# Altium PCB PCB Layout.PcbDoc
Units mil, origin at the board's own origin, x right, y up, seen from the top; angles counter-clockwise.
Board outline 8150 x 5500 mil, 2 copper layers (Top Layer, Bottom Layer); 110 components, 111 nets, 268 pads, 4 vias.
Unrouted connection lines stored in the file: 160.
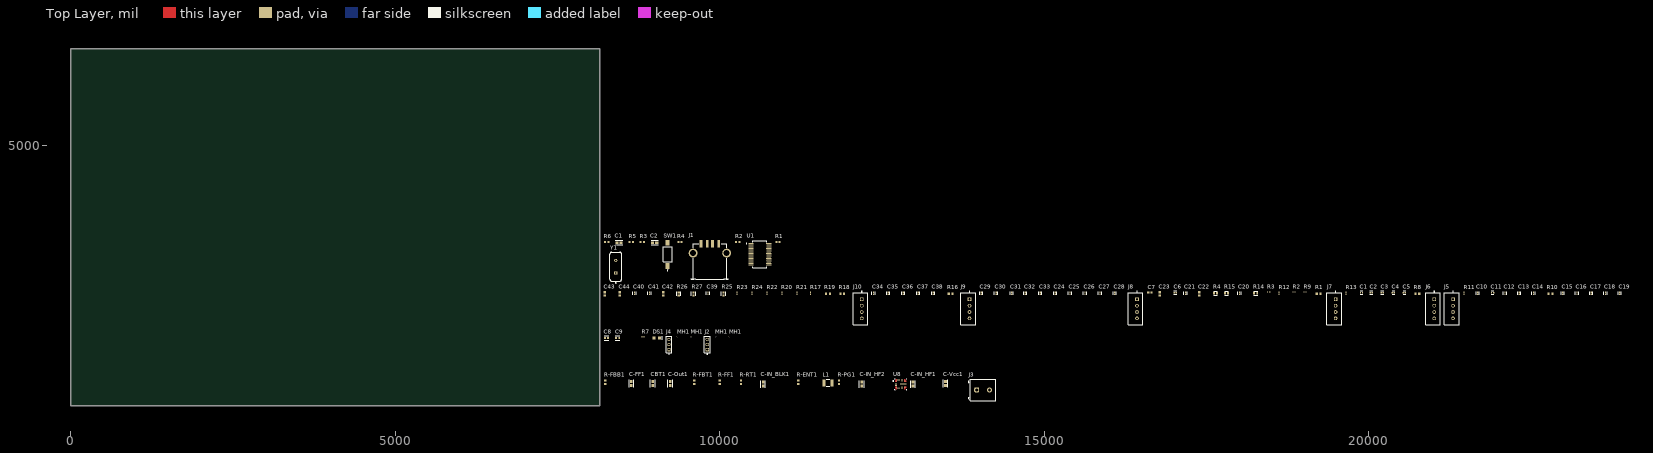
[diagram p0: Top Layer view]
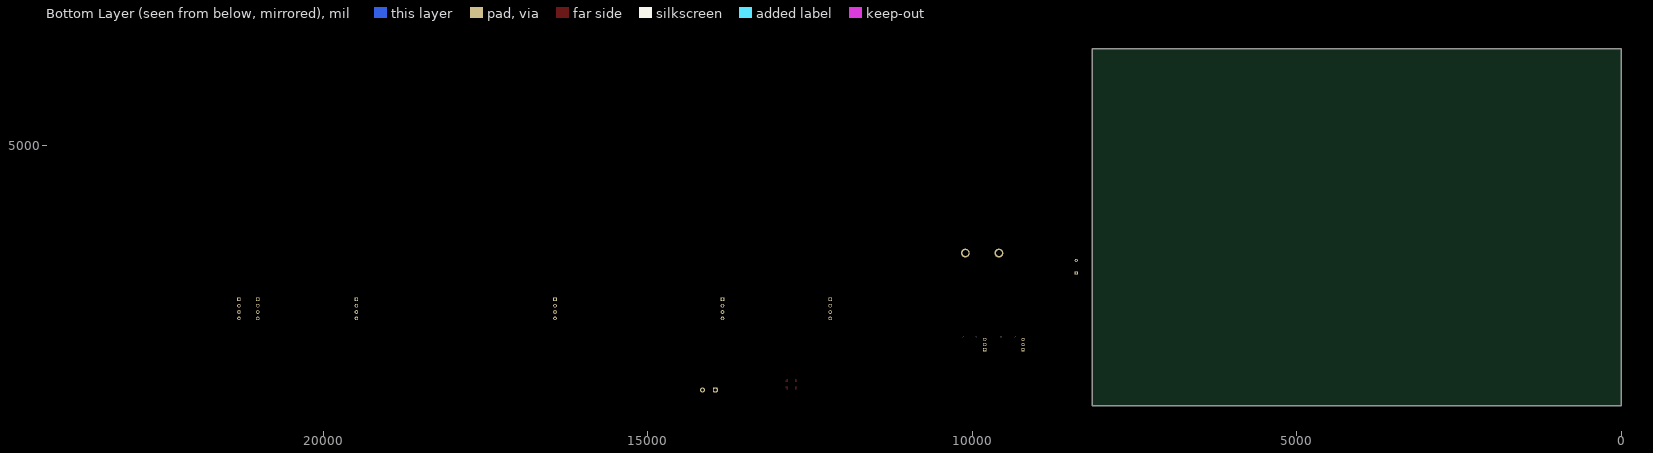
[diagram p1: Bottom Layer view, seen from below]

## Layer stack, top to bottom
Top Solder: solder mask 0.4, Solder Resist, Dk 3.5
Top Layer: signal copper 1.4
Dielectric 1: dielectric 12.6, FR-4, Dk 4.8
Bottom Layer: signal copper 1.4
Bottom Solder: solder mask 0.4, Solder Resist, Dk 3.5

## Board outline
0,1000 8150,1000 8150,6500 0,6500

## Design rules (kind name [scope] priority, off if disabled: settings)
Clearance [All] p1: gap=10 ignorepadtopadclearanceinfootprint=FALSE except(0: Arc-Hole Track-Hole SMDPad-Hole THPad-Hole Via-Hole Fill-Hole Poly-Hole Region-Hole Text-Hole)
PolygonConnect [All] p1: connectstyle=Relief reliefconductorwidth=10 reliefentries=4 polygonreliefangle="90 Angle" airgapwidth=10
RoutingVias [All] p1: holewidth=28 width=50 viastyle="Through Hole" minholewidth=28 minwidth=50 maxholewidth=28 maxwidth=50
SolderMaskExpansion [All] p1: expansion=4 istentingtop=FALSE
Width [All] p1: maxlimit=10 minlimit=10 preferedwidth=10
30 further rules are at their usual default settings.

## Classes and differential pairs
component class Drivers: C1 C2 C3 C4 C5 C6 C7 C10 C11 C12 C13 C14 C15 C16 C17 C18 C19 C20 C21 C22 C23 C24 C25 C26 C27 C28 C29 C30 C31 C32 C33 C34 C35 C36 C37 C38 C39 C40 C41 C42 C43 C44 J5 J6 J7 J8 J9 J10 R1 R2 R3 R4 R8 R9 R10 R11 R12 R13 R14 R15 R16 R17 R18 R19 R20 R21 R22 R23 R24 R25 R26 R27 U1 U?
component class FTDI: C1 C2 D1 D2 D3 J1 R1 R2 R3 R4 R5 R6 SW1 U1
component class Controller: C8 C9 DS1 J2 J4 MH1 R7 U1 Y1
component class Buck: C-FF1 C-IN_BLK1 C-IN_HF1 C-IN_HF2 C-Out1 C-Vcc1 CBT1 J3 L1 R-ENT1 R-FBB1 R-FBT1 R-FF1 R-PG1 R-RT1 U8

## Components (designator, comment, footprint, x,y, rotation, side; value= is the part's Value field where it differs from the comment)
C1 "C0402C104K8PACTU" FP-C0402-BB-MFG 19890,2740 r0 top value="0.10 μF"
C1 "GRM188R60J106ME47D" FP-GRM188-0_1-e0_2_0_55-IPC_A 8450,3510 r0 top
C2 "C0402C104K8PACTU" FP-C0402-BB-MFG 20040,2740 r0 top value="0.10 μF"
C2 "GRM188R60J106ME47D" FP-GRM188-0_1-e0_2_0_55-IPC_A 9000,3510 r0 top
C3 "C0402C104K8PACTU" FP-C0402-BB-MFG 20210,2740 r0 top value="0.10 μF"
C4 "C0402C104K8PACTU" FP-C0402-BB-MFG 20380,2740 r0 top value="0.10 μF"
C5 "C0402C104K8PACTU" FP-C0402-BB-MFG 20550,2740 r0 top value="0.10 μF"
C6 "C0402C104K8PACTU" FP-C0402-BB-MFG 17020,2740 r0 top value="0.10 μF"
C7 "06035C223KAZ2A" CAPC1608X90X35LL15T15 16630,2740 r0 top
C8 "C0603C220J1GACTU" FP-C0603C-CF-MFG 8260,2040 r0 top value="22 pF"
C9 "C0603C220J1GACTU" FP-C0603C-CF-MFG 8430,2040 r0 top value="22 pF"
C10 "C0402C104K8PACTU" FP-C0402-BB-MFG 21680,2730 r90 top value="0.10 μF"
C11 "C0402C104K8PACTU" FP-C0402-BB-MFG 21910,2740 r0 top value="0.10 μF"
C12 "C0402C104K8PACTU" FP-C0402-BB-MFG 22100,2730 r90 top value="0.10 μF"
C13 "C0402C104K8PACTU" FP-C0402-BB-MFG 22320,2730 r90 top value="0.10 μF"
C14 "C0402C104K8PACTU" FP-C0402-BB-MFG 22540,2730 r90 top value="0.10 μF"
C15 "C0402C104K8PACTU" FP-C0402-BB-MFG 22990,2730 r90 top value="0.10 μF"
C16 "C0402C104K8PACTU" FP-C0402-BB-MFG 23210,2730 r90 top value="0.10 μF"
C17 "C0402C104K8PACTU" FP-C0402-BB-MFG 23430,2730 r90 top value="0.10 μF"
C18 "C0402C104K8PACTU" FP-C0402-BB-MFG 23650,2730 r90 top value="0.10 μF"
C19 "C0402C104K8PACTU" FP-C0402-BB-MFG 23870,2730 r90 top value="0.10 μF"
C20 "C0402C104K8PACTU" FP-C0402-BB-MFG 18010,2730 r90 top value="0.10 μF"
C21 "C0402C104K8PACTU" FP-C0402-BB-MFG 17180,2730 r90 top value="0.10 μF"
C22 "06035C223KAZ2A" CAPC1608X90X35LL15T15 17390,2720 r90 top
C23 "06035C223KAZ2A" CAPC1608X90X35LL15T15 16780,2720 r90 top
C24 "C0402C104K8PACTU" FP-C0402-BB-MFG 15170,2730 r90 top value="0.10 μF"
C25 "C0402C104K8PACTU" FP-C0402-BB-MFG 15400,2730 r90 top value="0.10 μF"
C26 "C0402C104K8PACTU" FP-C0402-BB-MFG 15630,2730 r90 top value="0.10 μF"
C27 "C0402C104K8PACTU" FP-C0402-BB-MFG 15860,2730 r90 top value="0.10 μF"
C28 "C0402C104K8PACTU" FP-C0402-BB-MFG 16090,2730 r90 top value="0.10 μF"
C29 "C0402C104K8PACTU" FP-C0402-BB-MFG 14030,2730 r90 top value="0.10 μF"
C30 "C0402C104K8PACTU" FP-C0402-BB-MFG 14260,2730 r90 top value="0.10 μF"
C31 "C0402C104K8PACTU" FP-C0402-BB-MFG 14500,2730 r90 top value="0.10 μF"
C32 "C0402C104K8PACTU" FP-C0402-BB-MFG 14710,2730 r90 top value="0.10 μF"
C33 "C0402C104K8PACTU" FP-C0402-BB-MFG 14940,2730 r90 top value="0.10 μF"
C34 "C0402C104K8PACTU" FP-C0402-BB-MFG 12370,2730 r90 top value="0.10 μF"
C35 "C0402C104K8PACTU" FP-C0402-BB-MFG 12600,2730 r90 top value="0.10 μF"
C36 "C0402C104K8PACTU" FP-C0402-BB-MFG 12830,2730 r90 top value="0.10 μF"
C37 "C0402C104K8PACTU" FP-C0402-BB-MFG 13060,2730 r90 top value="0.10 μF"
C38 "C0402C104K8PACTU" FP-C0402-BB-MFG 13290,2730 r90 top value="0.10 μF"
C39 "C0402C104K8PACTU" FP-C0402-BB-MFG 9820,2730 r90 top value="0.10 μF"
C40 "C0402C104K8PACTU" FP-C0402-BB-MFG 8690,2730 r90 top value="0.10 μF"
C41 "C0402C104K8PACTU" FP-C0402-BB-MFG 8920,2730 r90 top value="0.10 μF"
C42 "06035C223KAZ2A" CAPC1608X90X35LL15T15 9130,2720 r90 top
C43 "06035C223KAZ2A" CAPC1608X90X35LL15T15 8230,2720 r90 top
C44 "06035C223KAZ2A" CAPC1608X90X35LL15T15 8460,2720 r90 top
C-FF1 "GRM188R60J106ME47D" FP-GRM188-0_1-e0_2_0_55-IPC_A 8640,1340 r90 top
C-IN_BLK1 "GRM188R60J106ME47D" FP-GRM188-0_1-e0_2_0_55-IPC_A 10670,1330 r90 top
C-IN_HF1 "GRM188R60J106ME47D" FP-GRM188-0_1-e0_2_0_55-IPC_A 12980,1330 r90 top
C-IN_HF2 "GRM188R60J106ME47D" FP-GRM188-0_1-e0_2_0_55-IPC_A 12190,1330 r90 top
C-Out1 "GRM188R60J106ME47D" FP-GRM188-0_1-e0_2_0_55-IPC_A 9240,1340 r90 top
C-Vcc1 "GRM188R60J106ME47D" FP-GRM188-0_1-e0_2_0_55-IPC_A 13480,1340 r90 top
CBT1 "GRM188R60J106ME47D" FP-GRM188-0_1-e0_2_0_55-IPC_A 8970,1340 r90 top
DS1 "HSMG-C170" AVAG-HSMX-C170_V 9030,2040 r0 top
J1 "62900416021" 62900416021 9850,3220 r0 top
J2 "NRPN031PAEN-RC" FP-NRPN031PAEN-RC-MFG 9810,1940 r90 top
J3 "691213710002" 691213710002 14060,1240 r0 top
J4 "NRPN031PAEN-RC" FP-NRPN031PAEN-RC-MFG 9220,1940 r90 top
J5 "B4B-XH-A(LF)(SN)" FP-B4B-XH-A_LF_SN-MFG 21280,2490 r90 top
J6 "B4B-XH-A(LF)(SN)" FP-B4B-XH-A_LF_SN-MFG 20990,2490 r90 top
J7 "B4B-XH-A(LF)(SN)" FP-B4B-XH-A_LF_SN-MFG 19470,2490 r90 top
J8 "B4B-XH-A(LF)(SN)" FP-B4B-XH-A_LF_SN-MFG 16410,2490 r90 top
J9 "B4B-XH-A(LF)(SN)" FP-B4B-XH-A_LF_SN-MFG 13830,2490 r90 top
J10 "B4B-XH-A(LF)(SN)" FP-B4B-XH-A_LF_SN-MFG 12170,2490 r90 top
L1 "" FP-B82422A-MFG 11670,1350 r0 top
MH1 "Mounting Hole_1" "Mounting Hole_1" 10150,2060 r90 top
MH1 "Mounting Hole_1" "Mounting Hole_1" 9560,2060 r90 top
MH1 "Mounting Hole_1" "Mounting Hole_1" 9350,2060 r90 top
MH1 "Mounting Hole_1" "Mounting Hole_1" 9940,2060 r90 top
R1 "RC0603JR-070RL" RESC1608X55X25ML10T15 19230,2720 r0 top
R1 "CRCW06030000Z0EA" RESC1609X50X30NL8T20 10900,3520 r0 top
R2 "CRCW0402220KFKED" RESC1005X40X25LL05T05 18850,2750 r0 top
R2 "CRCW06030000Z0EA" RESC1609X50X30NL8T20 10280,3520 r0 top
R3 "CRCW0402220KFKED" RESC1005X40X25LL05T05 18460,2750 r0 top
R3 "CRCW06030000Z0EA" RESC1609X50X30NL8T20 8810,3520 r0 top
R4 "CRCW0603100KJNEA" FP-CRCW0603-e3-IPC_C 17640,2730 r0 top
R4 "CRCW06030000Z0EA" RESC1609X50X30NL8T20 9390,3520 r0 top
R5 "CRCW06030000Z0EA" RESC1609X50X30NL8T20 8640,3520 r0 top
R6 "CRCW06030000Z0EA" RESC1609X50X30NL8T20 8260,3520 r0 top
R7 "CRCW0402220KFKED" RESC1005X40X25LL05T05 8820,2060 r0 top
R8 "RC0603JR-070RL" RESC1608X55X25ML10T15 20750,2720 r0 top
R9 "CRCW0402220KFKED" RESC1005X40X25LL05T05 19020,2750 r0 top
R10 "RC0603JR-070RL" RESC1608X55X25ML10T15 22800,2720 r0 top
R11 "CRCW0402220KFKED" RESC1005X40X25LL05T05 21470,2730 r90 top
R12 "CRCW0402220KFKED" RESC1005X40X25LL05T05 18620,2730 r90 top
R13 "CRCW0402220KFKED" RESC1005X40X25LL05T05 19650,2730 r90 top
R14 "CRCW0603100KJNEA" FP-CRCW0603-e3-IPC_C 18260,2730 r0 top
R15 "CRCW0603100KJNEA" FP-CRCW0603-e3-IPC_C 17810,2730 r0 top
R16 "RC0603JR-070RL" RESC1608X55X25ML10T15 13560,2720 r0 top
R17 "CRCW0402220KFKED" RESC1005X40X25LL05T05 11400,2730 r90 top
R18 "RC0603JR-070RL" RESC1608X55X25ML10T15 11890,2720 r0 top
R19 "RC0603JR-070RL" RESC1608X55X25ML10T15 11670,2720 r0 top
R20 "CRCW0402220KFKED" RESC1005X40X25LL05T05 10960,2730 r90 top
R21 "CRCW0402220KFKED" RESC1005X40X25LL05T05 11190,2730 r90 top
R22 "CRCW0402220KFKED" RESC1005X40X25LL05T05 10730,2730 r90 top
R23 "CRCW0402220KFKED" RESC1005X40X25LL05T05 10270,2730 r90 top
R24 "CRCW0402220KFKED" RESC1005X40X25LL05T05 10500,2730 r90 top
R25 "CRCW0603100KJNEA" FP-CRCW0603-e3-IPC_C 10060,2720 r90 top
R26 "CRCW0603100KJNEA" FP-CRCW0603-e3-IPC_C 9370,2720 r90 top
R27 "CRCW0603100KJNEA" FP-CRCW0603-e3-IPC_C 9600,2720 r90 top
R-ENT1 "" RESC1609X50X30NL8T20 11210,1360 r90 top
R-FBB1 "" RESC1609X50X30NL8T20 8240,1360 r90 top
R-FBT1 "" RESC1609X50X30NL8T20 9610,1360 r90 top
R-FF1 "" RESC1609X50X30NL8T20 10000,1360 r90 top
R-PG1 "" RESC1609X50X30NL8T20 11840,1360 r90 top
R-RT1 "" RESC1609X50X30NL8T20 10330,1360 r90 top
SW1 "FSMSMTR" TECO-FSMSMTR_V 9200,3330 r90 top
U1 "FT232RL-REEL" FP-SSOP-28-MFG 10620,3330 r0 top
U8 "LMQ61460AASQRJRRQ1" FP-RJR0014A-MFG 12790,1330 r0 top
Y1 "FOXSLF/160-20" FOX-FOXSLF160-20 8400,3140 r90 top

## Footprints (in the part's own frame and the unit in brackets; to place one, negate y for a bottom-side part, rotate by r counter-clockwise, add the part's x,y. Pads: shape width x height; smd on the part's side, far side on the other; paste and mask are expansions set on the pad)
62900416021 [mm] "USB 2.0 SMT Type A Horizontal"
  rect 1.12x2.88 smd: 1(-3.5,6.95) 2(-1,6.95) 3(1,6.95) 4(3.5,6.95)
  round 3.45 hole 2.3: Shell(-6.57,3.28) Shell(6.57,3.28)
  silkscreen extent -7.25,-7 7.29,7, body extent -7.81,-7 7.81,8.41, height 7.81
691213710002 [mm] "5,00mm - modular - green - Horizontal entry with rising cage clamp -  10,0mm height - 02p"
  rrect50% 1.95x1.95 hole 1.3: 1(-2.5,0)
  round 1.95 hole 1.3: 2(2.5,0)
  silkscreen extent -5.6,-4.15 5,4.15, body extent -5.6,-4.15 5,4.15, height 10.05
AVAG-HSMX-C170_V [mm] "SMD, 2-Leads, Body 2x1.25mm, Height 0.8mm"
  rect 1.2x1.2 smd: 1(-1.05,0) 2(1.05,0)
  silkscreen extent 2.15,-0.63 2.15,0.63, body extent -1,-0.63 1,0.63, height 0.8
CAPC1608X90X35LL15T15 [mm] "Chip Capacitor, 2-Leads, Body 1.60x0.81mm, IPC High Density"
  rect 0.85x0.9 smd: 1(-0.65,0) 2(0.65,0)
  body extent -0.88,-0.48 0.87,0.48, height 0.9
FOX-FOXSLF160-20 [mm] "THD, 2-Leads, Body 11.35x4.65mm"
  rect 1.2x1.2 hole 0.7: 1(-2.44,0)
  round 1.2 hole 0.7: 2(2.44,0)
  silkscreen extent -6.45,-2.32 5.68,2.32, body extent -5.67,-2.32 5.68,2.33, height 3.6
FP-B4B-XH-A_LF_SN-MFG [mm]
  rect 1.4x1.4 hole 0.9 paste-1000 mask+0: 1(3.75,-0.525)
  round 1.4 hole 0.9 paste-1000 mask+0: 2(1.25,-0.525) 3(-1.25,-0.525) 4(-3.75,-0.525)
  silkscreen extent -6.2,-2.88 6.87,2.88, body extent -6.3,-2.98 6.3,2.98, height 0.25
FP-B82422A-MFG [mm]
  rect 1.15x2.7 smd paste+0 mask+0: 1(-1.625,0) 2(1.625,0)
  silkscreen extent -0.67,-1.4 0.67,1.4, body extent -2.3,-1.5 2.3,1.5, height 0.25
FP-C0402-BB-MFG [mm]
  rect 0.52x0.52 smd paste+0 mask+0: 1(-0.4,0) 2(0.4,0)
  silkscreen extent -0.5,-0.64 0.5,0.64, body extent -0.8,-0.4 0.8,0.4, height 0.25
FP-C0603C-CF-MFG [mm]
  rect 0.75x0.9 smd paste+0 mask+0: 1(-0.6,0) 2(0.6,0)
  silkscreen extent -0.87,-0.85 0.88,0.85, body extent -1.2,-0.6 1.2,0.6, height 0.25
FP-CRCW0603-e3-IPC_C [mil]
  rect 28.94x33.94 smd paste+0 mask+0: 1(-24.23,0) 2(24.23,0)
  silkscreen extent -30,-33 30,33, body extent -43,-23 43,23, height 10
FP-GRM188-0_1-e0_2_0_55-IPC_A [mil]
  rect 47.57x39.85 smd paste+0 mask+0: 1(-31.57,0) 2(31.57,0)
  silkscreen extent -55,-36 55,36, body extent -75,-40 75,40, height 10
FP-NRPN031PAEN-RC-MFG [mm]
  rect 1.3x1.3 hole 0.8 paste-1000 mask+0: 1(-2,0)
  round 1.3 hole 0.8 paste-1000 mask+0: 2(0,0) 3(2,0)
  silkscreen extent -3.8,-1.1 3.25,1.1, body extent -3.35,-1.2 3.35,1.2, height 0.25
FP-RJR0014A-MFG [mm]
  round 0.394 smd paste-1000 mask+0: 1(-1.719,1.169) 5(-1.719,-1.206)
  rrect40% 0.7x0.25 smd paste+0 mask+0: 2(-1.85,0.525) 4(-1.85,-0.525)
  rrect33% 0.7x0.3 smd paste+0 mask+0: 3(-1.85,0)
  rrect40% 0.25x0.7 smd paste+0 mask+0: 6(-1.125,-1.6) 7(-0.625,-1.6) 13(-0.625,1.6) 14(-1.125,1.6)
  rrect25% 0.4x1 smd paste+0 mask+0: 8(0.45,-1.45) 12(0.45,1.45)
  round 0.45 smd paste-1000 mask+0: 9(1.65,-1.2) 11(1.65,1.2)
  rrect25% 2.4x0.4 smd paste-1000 mask+0: 10(1,0)
  Top Layer region: 1.45,-1.95 1.75,-1.95 1.769,-1.946 1.785,-1.935 1.796,-1.919 1.8,-1.9 1.8,-1.9 1.8,-1.47 1.816,-1.41 1.86,-1.366 1.92,-1.35 1.92,-1.35 2.15,-1.35 2.169,-1.346 2.185,-1.335 2.196,-1.319 2.2,-1.3 2.2,-1.3 2.2,-1 2.193,-0.975 2.175,-0.957 2.15,-0.95 2.15,-0.95 1.45,-0.95 1.431,-0.954 1.415,-0.965 1.404,-0.981 1.4,-1 1.4,-1 1.4,-1.9 1.404,-1.919 1.415,-1.935 1.431,-1.946 1.45,-1.95 1.45,-1.95
  Top Layer region: 1.45,1.95 1.75,1.95 1.769,1.946 1.785,1.935 1.796,1.919 1.8,1.9 1.8,1.9 1.8,1.47 1.816,1.41 1.86,1.366 1.92,1.35 1.92,1.35 2.15,1.35 2.169,1.346 2.185,1.335 2.196,1.319 2.2,1.3 2.2,1.3 2.2,1 2.193,0.975 2.175,0.957 2.15,0.95 2.15,0.95 1.45,0.95 1.431,0.954 1.415,0.965 1.404,0.981 1.4,1 1.4,1 1.4,1.9 1.404,1.919 1.415,1.935 1.431,1.946 1.45,1.95 1.45,1.95
  Top Layer region: -1.55,-1.95 -1.531,-1.946 -1.515,-1.935 -1.504,-1.919 -1.5,-1.9 -1.5,-1.9 -1.5,-1 -1.507,-0.975 -1.525,-0.957 -1.55,-0.95 -1.55,-0.95 -2.15,-0.95 -2.175,-0.957 -2.193,-0.975 -2.2,-1 -2.2,-1 -2.2,-1.3 -2.196,-1.319 -2.185,-1.335 -2.169,-1.346 -2.15,-1.35 -2.15,-1.35 -1.97,-1.35 -1.924,-1.359 -1.885,-1.385 -1.859,-1.424 -1.85,-1.47 -1.85,-1.47 -1.85,-1.9 -1.846,-1.919 -1.835,-1.935 -1.819,-1.946 -1.8,-1.95 -1.8,-1.95 -1.8,-1.95
  Top Layer region: -1.8,1.95 -1.55,1.95 -1.531,1.946 -1.515,1.935 -1.504,1.919 -1.5,1.9 -1.5,1.9 -1.5,1 -1.507,0.975 -1.525,0.957 -1.55,0.95 -1.55,0.95 -2.15,0.95 -2.175,0.957 -2.193,0.975 -2.2,1 -2.2,1 -2.2,1.3 -2.196,1.319 -2.185,1.335 -2.169,1.346 -2.15,1.35 -2.15,1.35 -1.97,1.35 -1.924,1.359 -1.885,1.385 -1.859,1.424 -1.85,1.47 -1.85,1.47 -1.85,1.9 -1.846,1.919 -1.835,1.935 -1.819,1.946 -1.8,1.95 -1.8,1.95
  silkscreen extent -3.02,-2.15 2.4,2.15, body extent -2.3,-2.05 2.3,2.05, height 0.25
FP-SSOP-28-MFG [mm]
  rect 2x0.4 smd paste+0 mask+0: 1(-3.5,4.225)
  rrect100% 2x0.4 smd paste+0 mask+0: 2(-3.5,3.575) 3(-3.5,2.925) 4(-3.5,2.275) 5(-3.5,1.625) 6(-3.5,0.975) 7(-3.5,0.325) 8(-3.5,-0.325) 9(-3.5,-0.975) 10(-3.5,-1.625) 11(-3.5,-2.275) 12(-3.5,-2.925) 13(-3.5,-3.575) 14(-3.5,-4.225) 15(3.5,-4.225) 16(3.5,-3.575) 17(3.5,-2.925) 18(3.5,-2.275) 19(3.5,-1.625) 20(3.5,-0.975) 21(3.5,-0.325) 22(3.5,0.325) 23(3.5,0.975) 24(3.5,1.625) 25(3.5,2.275) 26(3.5,2.925) 27(3.5,3.575) 28(3.5,4.225)
  silkscreen extent -5.3,-5.25 2.8,5.25, body extent -4.6,-5.55 4.6,5.55, height 0.25
"Mounting Hole_1" [mil]
RESC1005X40X25LL05T05 [mm] "Chip Resistor, 2-Leads, Body 1.00x0.50mm, IPC High Density"
  rect 0.45x0.45 smd: 1(-0.4,0) 2(0.4,0)
  body extent -0.53,-0.27 0.53,0.28, height 0.4
RESC1608X55X25ML10T15 [mm] "Chip Resistor, 2-Leads, Body 1.60x0.80mm, IPC Low Density"
  rect 0.8x1 smd: 1(-0.75,0) 2(0.75,0)
  body extent -0.85,-0.45 0.85,0.45, height 0.55
RESC1609X50X30NL8T20 [mm] "Chip Resistor, 2-Leads, Body 1.65x0.95mm, IPC Medium Density"
  rect 0.8x0.95 smd: 1(-0.65,0) 2(0.65,0)
  body extent -0.82,-0.48 0.82,0.48, height 0.5
TECO-FSMSMTR_V [mm] "SMD, 2-Leads, Body 6x3.5mm, Pitch 9.19mm"
  rect 2.2x1.6 smd: 1(-4.595,0)
  rect 2.18x1.6 smd: 2(4.595,0)
  silkscreen extent -6.37,-1.75 3,1.75, body extent -4.98,-1.75 4.98,1.75, height 4.4

## Part data
C1 C2 C3 C4 C5 C6 C10 C11 C12 C13 C14 C15 C16 C17 C18 C19 C20 C21 C24 C25 C26 C27 C28 C29 C30 C31 C32 C33 C34 C35 C36 C37 C38 C39 C40 C41: library part CMP-2008-02046-2, "CAP CER 0.1UF 10V X5R 0402", Capacitance="0.10 μF", Manufacturer=Kemet, Package=C0402-BB, Temperature="-55°C to +125°C", Temperature Characteristic=X5R, Temperature Coefficient=15%, Temperature Range High=+125°C, Temperature Range Low=-55°C, Tolerance=0.1, Voltage Rating="10 V", Automotive=No, Category=Cap, ComponentLink2Description=Datasheet, ComponentLink2URL=https://content.kemet.com/datasheets/KEM_C1002_X7R_SMD.pdf, Device Class L1="Passive Components", Device Class L2=Capacitors, Device Class L3="Ceramic Capacitors", Digikey Description="CAP CER 0.1UF 10V X5R 0402", Height=0.55mm, Ipc Land Pattern Name=CAPC10050X50, Lead Free=Yes, Manufacturer Part Number=C0402C104K8PACTU, Material=Ceramic, Mouser Description="Capacitor 100 nF 10 VDC 0402", Octopart=https://octopart.com/c0402c104k8pactu-kemet-140039, RoHS=TRUE
C1 C2 C-FF1 C-IN_BLK1 C-IN_HF1 C-IN_HF2 C-Out1 C-Vcc1 CBT1: library part CMP-2006-02792-2, "Chip Multilayer Ceramic Capacitors for General Purpose, 0603, 10uF, X5R, 15%, 20%, 6.3V", Capacitance=10uF, Case Code (Imperial)=0603, Case Code (Metric)=1608, Dielectric=X5R, Max Operating Temperature=85°C, Min Operating Temperature=-55°C, Package Quantity=4000, Tolerance=20%, Voltage=6.3V, Case/Package=0603, Depth=0.8mm, Height=0.8mm, Lead Free="Lead Free", Length=1.6mm, Material=Ceramic, Mount="Surface Mount", Packaging="Tape and Reel", Radiation Hardening=No, REACH SVHC="No SVHC", Termination=SMD/SMT, Thickness=0.035inch, Voltage Rating=6.3V, Voltage Rating (DC)=6.3V, Width=0.031inch
C7 C22 C23 C42 C43 C44: library part CMP-2006-02066-1, Manufacturer="AVX Interconnect / Elco", Part Number=06035C223KAZ2A
C8 C9: library part CMP-2006-03322-2, "CAP CER 22PF 100V 5% NP0 0603", Capacitance="22 pF", Manufacturer=KEMET, Package=C0603C-CF, Temperature="-55°C to +125°C", Temperature Characteristic=C0G, Temperature Coefficient=30ppm/°C, Temperature Range High=+125°C, Temperature Range Low=-55°C, Tolerance=0.05, Voltage Rating="100 V", Automotive=Yes, Automotive Grade="Grade 1", Category=Cap, ComponentLink2Description=Datasheet, ComponentLink2URL=https://api.kemet.com/component-edge/download/datasheet/C0603C100J5GACAUTO.pdf, Device Class L1="Passive Components", Device Class L2=Capacitors, Device Class L3="Ceramic Capacitors", Digikey Description="CAP CER 22PF 100V 5% NP0 0603", Height=0.87mm, Lead Free=Yes, Manufacturer Part Number=C0603C220J1GACTU, Material=Ceramic, Mouser Description="Multilayer Ceramic Capacitors MLCC - SMD/SMT 100volts 22pF C0G 5%", Octopart=https://octopart.com/c0603c220j1gactu-kemet-9142653, RoHS=TRUE
DS1: library part CMP-2000-05062-1, "Chip LED, Green, 2.2 V, -40 to 85 degC, 2-Pin SMD, Pb-Free, Tape and Reel", Forward Current If=20mA, Forward Voltage=2.2V, Forward Voltage VF Max=2.6V, LED Colour=Green, Manufacturer=Avago, Operating Temperature Max=85degC, Operating Temperature Min=-30degC, Operating Temperature Range=-30degCto+85degC, Opto Case Style=SMD, Package Description="2-Pin Surface Mount Device, Body 2 x 1.25 mm, Height 0.8 mm", Package Reference=HSMX-C170, Storage Temperature Min=-40degC, Bulb Size=1.25mmx1.4mm, Datasheet URL=https://datasheet.ciiva.com/29280/180495-da-01-en-chip-led-hsmg-c170-gelb-gruen-29280971.pdf, Datasheet Version=Oct-08, Dominant Wavelength=572nm, Dominant Wavelength Typ=572nm, External Depth=0.8mm, External Length / Height=2mm, External Width=1.25mm, Forward Current If Max=20mA, LED Mounting=SMD, LED Type=Standard, Lens Shape=Rectangular, Light Area Height=1mm, Luminous Intensity=15mcd, Luminous Intensity Min=4mcd, Luminous Intensity Typ=15mcd, Manufacturer URL=http://www.avagotech.com/, Mounting Type=SMD, MSL=MSL2A-4weeks, No. of Pins=2, Opto Mounting Orientation=Top, Packaging=CutTape, Peak Forward Current=20mA, Peak Wavelength=570nm, PIV Max=5V, Storage Temperature Max=85degC, SVHC=NoSVHC(16-Jun-2014), Viewing Angle=170deg, Voltage Vf Typ=2.2V, Wavelength Typ=570nm
J1: library part CMP-1502-03240-2, Contact Resistance=20mΩ, Current Rating=1.5A, Insulation Resistance=1GΩ, Max Operating Temperature=105°C, Min Operating Temperature=-40°C, Operating Supply Voltage=30V, Connector Type=USB, Contact Plating=Gold, Features=Shielded, Gender=Receptacle, Lead Free="Lead Free", Length=14.4mm, Mount="Horizontal, Surface Mount", NexarPartId=19991170, Number of Contacts=4, Number of Pins=4, Orientation=Horizontal, Packaging="Cut Tape", REACH SVHC=Unknown, RoHS=Compliant, Termination=SMD/SMT, USB Standard="USB 2.0"
J2 J4: library part CMP-25680-000021-1, "CONN HEADER VERT 3POS 2MM", Current Rating=2A, Manufacturer=Sullins, Package=0, Temperature="-40°C to +105°C", Temperature Range High=+105°C, Temperature Range Low=-40°C, Voltage Rating=150V, Automotive=No, Category=Conn, ComponentLink2Description=Datasheet, ComponentLink2URL=https://drawings-pdf.s3.amazonaws.com/10531.pdf, Conn Gender=Male, Conn Orientation=Straight, Contact Material=Gold,Nickel, Device Class L1=Connectors, Device Class L2="Headers and Wire Housings", Device Class L3=unset, Digikey Description="CONN HEADER VERT 3POS 2MM", Height=6mm, Lead Free=Yes, Manufacturer Part Number=NRPN031PAEN-RC, Number of Contacts=3, Number Of Rows=1, Octopart=https://octopart.com/nrpn031paen-rc-sullins-12817732, Pitch=2mm, RoHS=TRUE
J3: library part CMP-1502-02526-2, Color=Green, Current=10A, Max Operating Temperature=105°C, Min Operating Temperature=-40°C, Voltage=300V, Contact Material=Brass, Contact Plating=Tin, Current Rating=10A, Height=10mm, Housing Material=Nylon, Lead Pitch=5mm, Length=8.3mm, Mount="Through Hole", NexarPartId=8917718, Number of Contacts=2, Number of Levels=1, Number of Pins=2, Number of Positions Per Level=2, Packaging=Box, Pitch=5.0038mm, Plating="Brass, Steel", REACH SVHC=Unknown, RoHS=Compliant, Stripping Length=-7mm, Termination=Screw, Voltage Rating=300V, Width=10.6mm, Wire Gauge (Max)=26AWG, Wire Gauge (Min)=16AWG, Wire/Cable Gauge=26AWG
J5 J6 J7 J8 J9 J10: library part CMP-17439-000250-1, "CONN HEADER VERT 4POS 2.5MM", Color=Natural, Contact Resistance=20mR, Current Rating=3A, Flammability Rating="UL94 V-0", Housing Color=White, Insulation Resistance=1GR, Max Operating Temperature=85°C, Max Voltage Rating (AC)=250V, Min Operating Temperature=-25°C, Package Quantity=500, Connector Type=Header, Contact Finish - Mating=TIN, Contact Material=Brass, Contact Plating=Tin, Contact Shape=Square, Contact Type="Male Pin", Depth=5.75mm, Fastening Type=Detent, Gender=Male, Housing Material=Polyamide, Insulation Color=Natural, Insulation Material=Nylon, Lead Free="Lead Free", Lead Pitch=2.5mm, Length=12.4mm, Mated Stacking Heights=9.8mm, Material=Polyamide, Max Current Rating=3A, Max Voltage Rating (DC)=250V, Mount="Through Hole", Number of Contacts=4, Number of Positions=4, Number Of Rows=1, Orientation=Straight, Packaging=Bulk, Pitch=2.5mm, REACH SVHC="No SVHC", Series=XH, Termination=Solder, Voltage Rating=250V, Voltage Rating (AC)=250V, Wire/Cable Gauge=22AWG
L1: library part CMP-2000-05912-2, "FIXED IND 10UH 180MA 1.6 OHM SMD", Case Code (Imperial)=1210, Case Code (Metric)=3225, Current Rating=180mA, DC Resistance (DCR)=1.6R, Inductance=10uH, Inductance Tolerance=10%, Max Operating Temperature=125°C, Package Quantity=2000, Ratings=AEC-Q200, Resistor Type=Wirewound, Self Resonant Frequency=25MHz, Test Frequency=1MHz, Case/Package=1210, Contact Plating=Tin, Core Material=Ferrite, DC Current=180mA, Depth=2.8mm, Height=2.1mm, Height - Seated (Max)=0.083inch, Lead Free="Lead Free", Length=3.5mm, Max DC Current=180mA, Military Standard=Not, Mount="Surface Mount", Number of Pins=2, Packaging="Tape and Reel", Q Factor=27, Radiation Hardening=No, Rated Current-Max=180mA, REACH SVHC="No SVHC", RoHS Compliant=Yes, Series=SIMID, Series Resistance=1.6R, Shielding=Unshielded, Termination=SMD/SMT, Tolerance=10%, Weight=0.001764oz, Width=0.098inch
R1 R8 R10 R16 R18 R19: library part CMP-2100-03667-1, "Chip Resistor, 0 Ohm, +/- 5%, 0.1 W, -55 to 155 degC, 0603 (1608 Metric), RoHS, Tape and Reel", Case Code (Imperial)=0603, Case Code (Metric)=1608, Manufacturer=Yageo, Max Operating Temperature=155degC, Min Operating Temperature=-55degC, Package Description="2-Pin Surface Mount Device, Body 1.6 x 0.8 mm", Package Quantity=5000, Power Rating=100mW, Resistance=0mOhm, Temperature Coefficient=200ppm/degreesC, Tolerance=5%, Voltage Rating=50V, Case/Package=0603, Composition=ThickFilm, Contact Plating=Tin, Datasheet URL=http://www.yageo.com/NewPortal/yageodocoutput?fileName=/pdf/R-Chip/PYu-RC_Group_51_RoHS_L_5.pdf, Datasheet Version="Rev. 5, 10/2016", Depth=0.8mm, Height=0.45mm, Lead Free=LeadFree, Length=1.6mm, Manufacturer URL=http://www.yageo.com/, Military Standard=Not, Number of Pins=2, Package Reference=0603, Packaging=TapeandReel, Radiation Hardening=No, REACH SVHC=NoSVHC, RoHSCompliant=true, Termination=SMD/SMT, Voltage Rating (DC)=50V, Width=0.8mm
R1 R2 R3 R4 R5 R6 R-ENT1 R-FBB1 R-FBT1 R-FF1 R-PG1 R-RT1: library part CMP-2000-03816-5, "Chip Resistor, 0 Ohm, Jumper, 100 mW, -55 to 155 degC, 0603 (1608 Metric), RoHS, Tape and Reel", Manufacturer="Vishay Semiconductor", Max Operating Temperature="155 degC", Min Operating Temperature="-55 degC", Package Quantity=5000, Voltage Rating="75 V", ComponentLink1Description="Manufacturer URL", ComponentLink1URL=http://www.vishay.com/, ComponentLink2Description=Datasheet, ComponentLink2URL=http://www.vishay.com/docs/20035/dcrcwe3.pdf, DatasheetVersion=06/2012, Height="0.45 mm", Length="1.55 mm", Mount="Surface Mount", Mounting Technology="Surface Mount", PackageDescription="2-Pin Surface Mount Device, Body 1.575 x 0.85 mm", PackageReference=0603, Packaging="Tape and Reel", Pins=2, REACH SVHC=Unknown, RoHSCompliant=true
R2 R3 R7 R9 R11 R12 R13 R17 R20 R21 R22 R23 R24: library part CMP-2002-08370-1, Manufacturer="Vishay Dale", Part Number=CRCW0402220KFKED
R4 R14 R15 R25 R26 R27: library part CMP-2000-03823-2, "RES Thick Film, 100kΩ, 5%, 0.1W, 200ppm/°C, 0603", Case Code (Imperial)=0603, Case Code (Metric)=1608, Max Operating Temperature=155°C, Max Power Dissipation=100mW, Min Operating Temperature=-55°C, Package Quantity=1, Resistance=100kR, Temperature Coefficient=200ppm/°C, Tolerance=5%, Voltage Rating=75V, Case/Package=0603, Composition="Thick Film", Contact Plating=Tin, Depth=0.85mm, Features="Automotive AEC-Q200", Height=0.02inch, Length=1.55mm, Military Standard=Not, Mount="Surface Mount", Number of Pins=2, Number of Terminations=2, Packaging="Tape and Reel", Power Rating=100mW, Radiation Hardening=No, Termination=SMD/SMT, Weight=7.1E-05oz, Width=0.85mm, Working Voltage=75V
SW1: library part CMP-2000-07501-1, "FSMSM Push Button Switch, 50 mA, -35 to 85 degC, 2-Pin SMD, RoHS, Tape and Reel", Case\/Package=SMD/SMT, Contact Current Rating=50mA, Contact Resistance=100mOhm, Manufacturer="TE Connectivity", Max Operating Temperature=85degC, Max Voltage Rating (DC)=12V, Min Operating Temperature=-35degC, Operating Force=180gf, Package Description="2-Pin Surface Mount Device, Body 6 x 3.5 mm, Pitch 9.19 mm", Package Quantity=1800, Voltage Rating (DC)=24V, Actuator Length=1.07mm, Actuator Material=Polyamide, Contact Material=Brass, Contact Plating=Silver, Current Rating=50mA, Datasheet URL=http://www.te.com/commerce/DocumentDelivery/DDEController?Action=showdoc&DocId=Customer+Drawing%7F1437566-3%7FC2%7Fpdf%7FEnglish%7FENG_CD_1437566-3_C2_1437566_3_1_c.dwg.pdf%7F1437566-4, Datasheet Version="Rev. C2, 08/2014", Electrical Life=20000Cycles, ELV=Compliant, Illumination Type=Illuminated, Lead Free=LeadFree, Manufacturer URL=http://www.te.com/, Mechanical Life=20000Cycles, Mount=SurfaceMount, Mounting Technology=SurfaceMount, Orientation=Straight, Package Reference=FSMSMTR, Packaging=TapeandReel, REACH SVHC=Unknown, RoHSCompliant=true, Switch Travel=0.25mm, Termination=GullWing, Throw Configuration=SPST
U1: library part CMP-0078-00029-4, "IC USB FS SERIAL UART 28-SSOP", Case/Package=SSOP, Max Operating Temperature=85°C, Max Supply Voltage=5.25V, Min Operating Temperature=-40°C, Min Supply Voltage=3.3V, Operating Supply Current=15mA, Package Quantity=2000, Voltage=5V, Data Rate=12Mbps, Height=1.75mm, Interface=UART, Lead Free="Lead Free", Length=10.2mm, Mount="Surface Mount", Number of Channels=1, Number of Pins=28, Number of Transceivers=1, Packaging="Tape and Reel", Radiation Hardening=No, REACH SVHC="No SVHC", Weight=0.080001oz, Width=5.3mm
U8: library part CMP-04918-000596-1, "AUTOMOTIVE 3-V TO 36-V, 6-A LOW"
Y1: library part CMP-1749-00003-1, "Resistance Weld Thru-Hole Crystal, 16 MHz, -20 to 70 degC, 2-Pin THD, RoHS, Bulk", Case\Package=Axial, Max Operating Temperature="155 degC", Min Operating Temperature="-55 degC", Package Quantity=200, Power Rating="250 mW", Resistance="221 kohm", Tolerance=1%, Voltage Rating="250 V", ComponentLink1Description="Manufacturer URL", ComponentLink1URL=http://www.foxonline.com/, ComponentLink2Description=Datasheet, ComponentLink2URL=http://www.foxonline.com/pdfs/hc49slf.pdf, DatasheetVersion=Mar-15, Length="0.248 inch", Mount="Through Hole", PackageDescription="2-Pin Through Hole Device, Body 11.35 x 4.65 mm", PackageReference=FOXSLF160-20, Packaging=Bulk, RoHSCompliant=true

## Via types
v1: diameter 20.87, hole 18, Top Layer to Bottom Layer, 4 vias

## Nets (pads, with @x,y where several pads share a name; then routed paths per layer and width w, separated by ;. In a path a pad name is that pad's centre, name@x,y a point inside that pad or via, vN(x,y) a via of type N, cw(c..) or ccw(c..) an arc to the next point about the centre after c; other vN are vias at no path point)
"24 V": C1.1@19874.25,2740 C2.1@20024.25,2740 C3.1 C4.1 C5.1 C6.1 C10.1 C11.1 C12.1 C13.1 C14.1 C15.1 C16.1 C17.1 C18.1 C19.1 C20.1 C21.1 C24.1 C25.1 C26.1 C27.1 C28.1 C29.1 C30.1 C31.1 C32.1 C33.1 C34.1 C35.1 C36.1 C37.1 C38.1 C39.1 C40.1 C41.1 C-IN_BLK1.2 C-IN_HF1.2 C-IN_HF2.2 J3.2 R-ENT1.1 U1.28 U8.8 U8.12
+5: C1.1@8418.43,3510 C-Out1.1 J1.1 L1.2 R3.2@8835.59,3520 R4.2@9415.59,3520 R5.2 R6.2 R7.1 R-FBT1.2 R-FF1.2 R-PG1.1 U8.1
GND: C1.2 C2.2@20055.75,2740 C3.2 C4.2 C8.2 C9.2 C10.2 C11.2 C12.2 C13.2 C15.2 C16.2 C17.2 C18.2 C24.2 C25.2 C26.2 C27.2 C29.2 C30.2 C31.2 C32.2 C34.2 C35.2 C36.2 C37.2 C-IN_BLK1.1 C-IN_HF1.1 C-IN_HF2.1 C-Out1.2 C-Vcc1.2 J1.4 J1.Shell J3.1 R1.1@19200.47,2720 R2.2@18865.75,2750 R3.2@18475.75,2750 R4.2@17664.23,2730 R8.1 R9.2 R10.1 R11.2 R12.2 R13.2 R14.2 R15.2 R16.1 R17.2 R18.1 R19.1 R20.2 R21.2 R22.2 R23.2 R24.2 R25.2 R26.2 R27.2 R-FBB1.1 R-PG1.2 R-RT1.1 SW1.2 U1.3 U1.18 U8.3 U8.5 U8.9 U8.11
NetC2_1: C2.1@8968.43,3510
NetC2_2: C2.2@9031.57,3510 R4.1@9364.41,3520 SW1.1
NetC5_2: C5.2 R1.2@19259.53,2720
NetC6_2: C6.2
NetC7_1: C7.1 U1.5
NetC7_2: C7.2
NetC8_1: C8.1 U1.7 Y1.2
NetC9_1: C9.1 U1.8 Y1.1
NetC14_2: C14.2 R8.2
NetC19_2: C19.2 R10.2
NetC20_2: C20.2
NetC21_2: C21.2
NetC22_1: C22.1
NetC22_2: C22.2
NetC23_1: C23.1
NetC23_2: C23.2
NetC28_2: C28.2 R16.2
NetC33_2: C33.2 R18.2
NetC38_2: C38.2 R19.2
NetC39_2: C39.2
NetC40_2: C40.2
NetC41_2: C41.2
NetC42_1: C42.1
NetC42_2: C42.2
NetC43_1: C43.1
NetC43_2: C43.2
NetC44_1: C44.1
NetC44_2: C44.2
NetC-FF1_1: C-FF1.1 R-FF1.1
NetC-FF1_2: C-FF1.2 R-FBB1.2 R-FBT1.1 U8.4
NetC-Vcc1_1: C-Vcc1.1 U8.2
NetCBT1_1: CBT1.1 L1.1 U8.10
NetCBT1_2: CBT1.2 U8.13 U8.14
NetD1_1: R6.1
NetD2_1: R5.1
NetD2_2: 
NetD3_1: R3.1@8784.41,3520
NetD3_2: 
NetDS1_1: DS1.1 R7.2
NetDS1_2: DS1.2 U1.4
NetJ1_2: J1.2
NetJ1_3: J1.3
NetJ2_1: J2.1
NetJ2_2: J2.2 U1.25
NetJ2_3: J2.3
NetJ4_1: J4.1 U1.19
NetJ4_2: J4.2 U1.22
NetJ4_3: J4.3 U1.23
NetJ5_1: J5.1
NetJ5_2: J5.2
NetJ5_3: J5.3
NetJ5_4: J5.4
NetJ6_1: J6.1 U1.24
NetJ6_2: J6.2 U1.21
NetJ6_3: J6.3 U1.26
NetJ6_4: J6.4 U1.1
NetJ7_1: J7.1
NetJ7_2: J7.2
NetJ7_3: J7.3
NetJ7_4: J7.4
NetJ8_1: J8.1
NetJ8_2: J8.2
NetJ8_3: J8.3
NetJ8_4: J8.4
NetJ9_1: J9.1
NetJ9_2: J9.2
NetJ9_3: J9.3
NetJ9_4: J9.4
NetJ10_1: J10.1
NetJ10_2: J10.2
NetJ10_3: J10.3
NetJ10_4: J10.4
NetR1_1: R1.1@10874.41,3520
NetR1_2: R1.2@10925.59,3520
NetR2_1: R2.1@18834.25,2750
NetR2_2: R2.2@10305.59,3520
NetR3_1: R3.1@18444.25,2750 U1.27
NetR4_1: R4.1@17615.77,2730 U1.20
NetR9_1: R9.1
NetR11_1: R11.1
NetR12_1: R12.1
NetR13_1: R13.1
NetR14_1: R14.1
NetR15_1: R15.1
NetR17_1: R17.1
NetR20_1: R20.1
NetR21_1: R21.1
NetR22_1: R22.1
NetR23_1: R23.1
NetR24_1: R24.1
NetR25_1: R25.1
NetR26_1: R26.1
NetR27_1: R27.1
NetR-ENT1_2: R-ENT1.2 U8.7
NetR-RT1_2: R-RT1.2 U8.6
NetU1_1: 
NetU1_2: U1.2
NetU1_6: U1.6
NetU1_9: U1.9
NetU1_10: U1.10
NetU1_11: U1.11
NetU1_12: U1.12
NetU1_13: U1.13
NetU1_14: U1.14
NetU1_15: U1.15
NetU1_16: U1.16
NetU1_17: U1.17
NetU1_19: 
pads on no net: R2.1@10254.41,3520
copper on no net:
  other v1: 9350,2060 9560,2060 9940,2060 10150,2060